# Altium PCB PA_Receiver.PcbDoc (part 2 of 2)
Units mm, origin at the board's own origin, x right, y up, seen from the top; angles counter-clockwise.
Board outline 99.95 x 68.33 mm, 4 copper layers (Top Layer, Layer 1, Layer 2, Bottom Layer), stack 0.603 mm thick; 128 components, 106 nets, 468 pads, 289 vias.
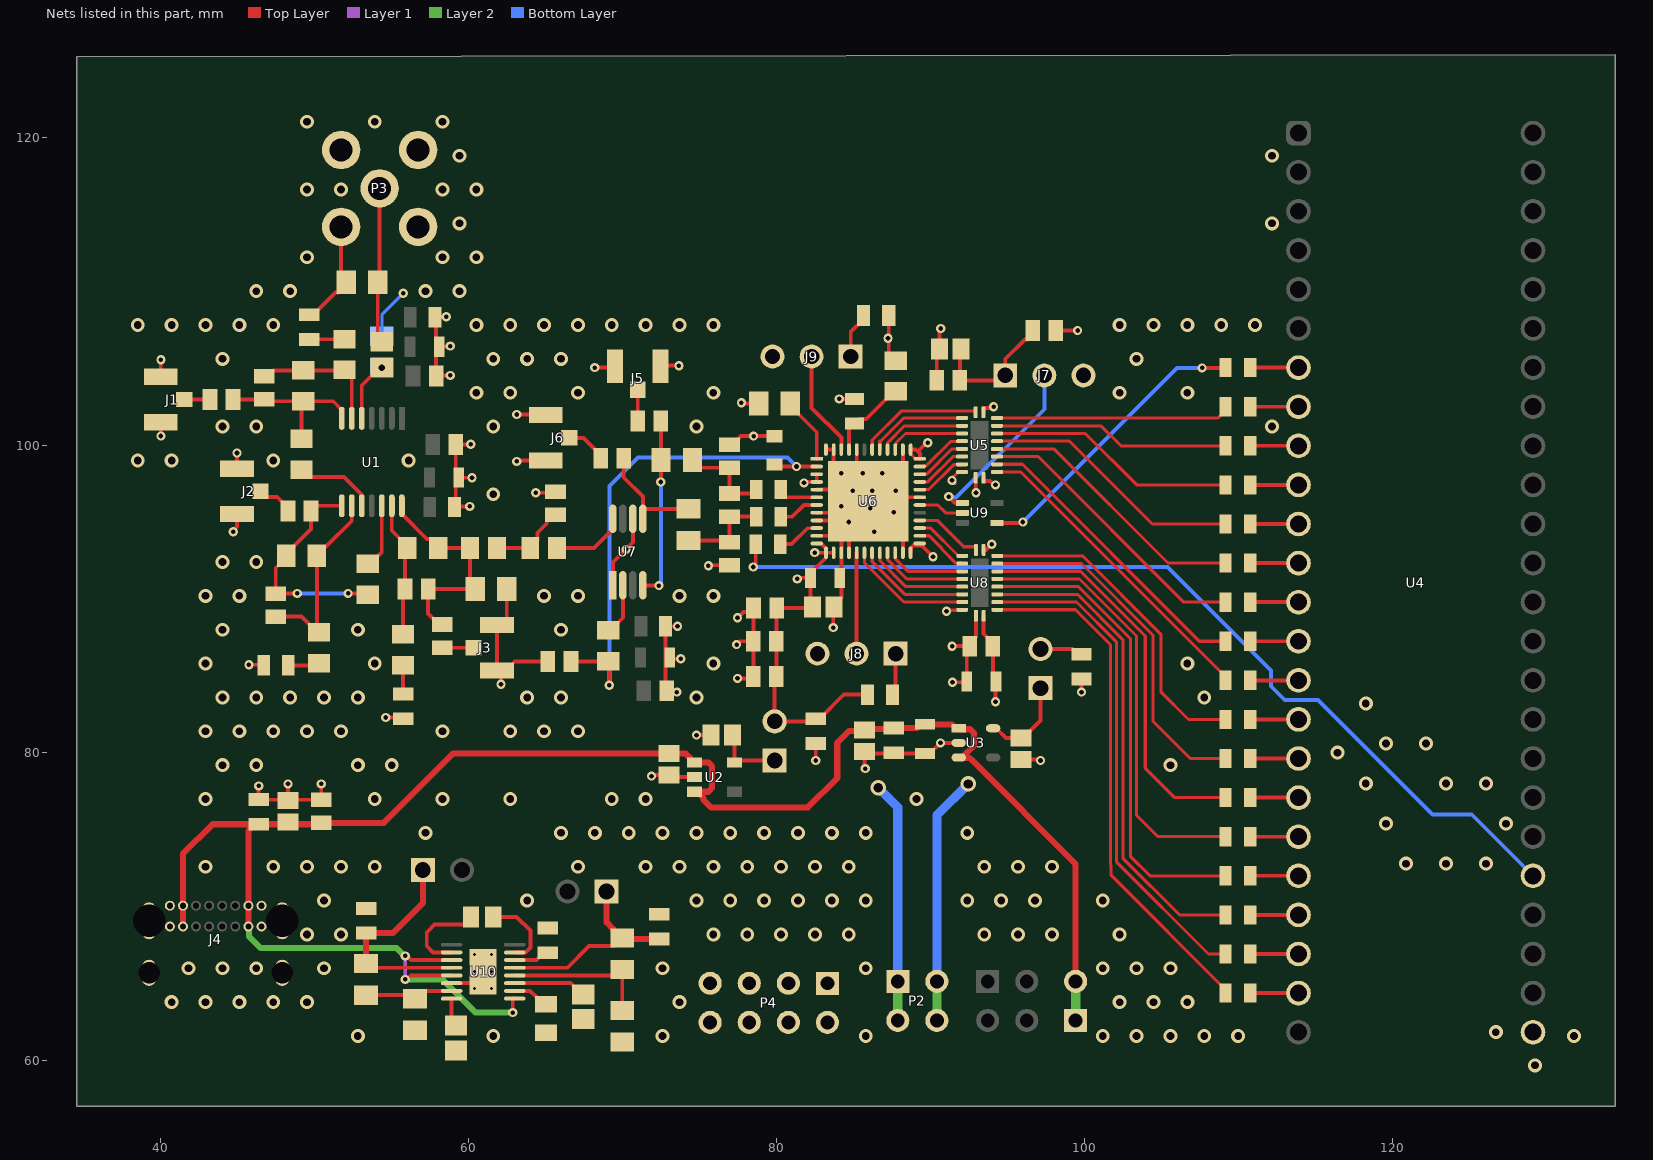
[diagram p4: the nets of this part, all layers, seen from the top]

## Via types
v1: diameter 0.9, hole 0.5, Top Layer to Bottom Layer, tented top, 195 vias
v2: diameter 0.6, hole 0.3, Top Layer to Bottom Layer, tented top, 84 vias
v3: diameter 0.5, hole 0.2, Top Layer to Bottom Layer, tented top, 6 vias
v4: diameter 1, hole 0.6, Top Layer to Bottom Layer, tented top, 2 vias
v5: diameter 0.6, hole 0.3, Top Layer to Bottom Layer, tented both sides, 1 vias
v6: diameter 0.8, hole 0.4, Top Layer to Bottom Layer, tented both sides, 1 vias

## Nets (pads, with @x,y where several pads share a name; then routed paths per layer and width w, separated by ;. In a path a pad name is that pad's centre, name@x,y a point inside that pad or via, vN(x,y) a via of type N, cw(c..) or ccw(c..) an arc to the next point about the centre after c; other vN are vias at no path point) (continued)
ADC_AVDD: C19.2 C20.1 C21.1 C22.1 C23.1 C24.1 P2.1 P2.3 R36.2 R37.2 R38.2 R39.2 U6.3 U6.4 U6.12 U6.13 U6.14 W3.2 | length 44.9
  Top Layer w0.25: v2(77.724,102.743) 77.765,102.702 R36.2@78.844,102.702 ; v2(81.355,91.301) 81.43,91.375 C21.1@82.205,91.375 ; v2(81.788,97.536) 81.854,97.602 U6.4@82.614,97.602 U6.3@82.614,98.102 ; v2(82.489,93.011) 82.5,93.001 U6.13@83.215,93.001 ; U6.12@82.614,93.602 82.898,93.602 83.215,93.284 U6.13@83.215,93.001 ; U6.14@83.715,93.001 U6.13@83.215,93.001 ; R37.2@85.902,83.779 84.372,83.779 82.8,82.207 C20.1@82.55,82.207 82.385,82.042 W3.2@79.883,82.042 79.883,84.848 C22.1@79.998,84.963 79.998,89.396 C24.1@80.01,89.408 82.267,89.408 C19.2@82.328,89.47 82.205,89.593 C21.1@82.205,91.375 ; R38.2@87.298,108.417 87.298,105.925 R39.2@87.743,105.48 ; C21.1@82.205,91.375 82.205,91.675 83.207,92.677 83.207,92.992 U6.13@83.215,93.001
  Layer 2 w0.6: P2.3@87.884,62.611 P2.1@87.884,65.151
  Bottom Layer w0.6: v4(86.614,77.724) 87.884,76.454 P2.1@87.884,65.151
  other v2: 87.249,106.934
ADC_CLKIN: R34.1 U4.29 | length 61.1
  Top Layer w0.25: v2(78.486,92.075) 78.65,92.239 R34.1@78.65,93.558
  Bottom Layer w0.25: v2(78.486,92.075) 105.41,92.075 112.138,85.347 ; 112.141,85.344 112.141,84.328 113.03,83.439 115.189,83.439 122.639,75.989 125.179,75.989 U4.29@129.159,72.009
ADC_CLKOUT: U6.30 U9.2 | length 3
  Top Layer w0.2: U6.30@89.317,96.102 90.481,96.102 90.993,95.59 U9.2@92.079,95.59
ADC_CLKOUT_F: R12.1 U9.4 | length 19
  Top Layer w0.25: U9.4@94.329,94.94 95.956,94.94 v2(96.012,94.996) ; v2(107.657,105.012) 109.165,105.012 R12.1@109.182,105.029
  Bottom Layer w0.25: v2(96.012,94.996) 106.028,105.012 v2(107.657,105.012)
ADC_DITH: J8.2 U6.17 | length 6.6
  Top Layer w0.25: J8.2@85.203,86.446 85.209,86.452 85.209,92.995 U6.17@85.215,93.001
ADC_MODE: R39.1 R40.2 U6.45 | length 5.4
  Top Layer w0.25: U6.45@84.715,99.703 84.715,101.094 85.015,101.394 R40.2@85.076,101.394 85.376,101.694 85.832,101.694 87.618,103.48 R39.1@87.743,103.48
ADC_OVDD: C33.2 C34.1 C35.1 C36.1 C37.1 C48.1 J7.1 P2.2 P2.4 U5.20 U6.24 U6.25 U6.36 U6.37 U8.20 W4.2 | length 41.2
  Top Layer w0.2: U6.37@88.715,99.703 88.715,99.419 89.033,99.102 U6.36@89.317,99.102
  Top Layer w0.25: U6.24@88.715,93.001 88.715,93.284 88.884,93.452 ; U6.37@88.715,99.703 89.051,99.703 89.178,99.576 ; U6.25@89.317,93.602 89.033,93.602 88.884,93.452 ; U6.36@89.317,99.102 89.317,99.438 89.178,99.576 ; v2(89.827,100.149) 89.751,100.149 89.178,99.576 ; v2(90.175,92.74) 89.463,93.452 88.884,93.452 ; v2(91.411,86.926) 91.414,86.93 C36.1@92.565,86.93 ; v2(91.44,84.582) 92.304,84.582 C35.1@92.365,84.644 92.365,86.73 C36.1@92.565,86.93 ; C33.2@91.983,106.234 91.918,106.169 C37.1@91.918,104.202 94.55,104.202 J7.1@94.869,104.521 94.869,105.596 96.14,106.867 96.284,106.867 96.659,107.242 C48.1@96.659,107.442 ; U5.20@92.946,97.864 92.951,97.859 92.951,96.914 v2(92.964,96.901) ; U8.20@92.962,88.911 92.962,87.527 92.565,87.13 C36.1@92.565,86.93 ; W4.2@97.155,86.741 99.229,86.741 99.572,86.398 C34.1@99.822,86.398
  Layer 1 w0.25: v2(89.827,100.149) 89.862,100.149 v2@89.916,100.203
  Layer 2 w0.6: P2.4@90.424,62.611 P2.2@90.424,65.151
  Bottom Layer w0.6: P2.2@90.424,65.151 90.424,75.946 v4(92.456,77.978)
ADC_RAND: J9.2 U6.46 | length 6.8
  Top Layer w0.25: J9.2@82.282,105.75 82.282,102.416 84.215,100.483 U6.46@84.215,99.703
ADC_VCM: C43.1 C49.1 R22.1 U6.2 | length 32.9
  Top Layer w0.25: C43.1@66.649,85.938 69.058,85.938 R22.1@69.074,85.954 69.142,85.886 v2(69.142,84.395) ; C49.1@79.869,98.729 79.996,98.602 v2(81.305,98.602) U6.2@82.614,98.602
  Bottom Layer w0.25: v2(69.142,84.395) 69.142,97.336 70.993,99.187 80.72,99.187 v2(81.305,98.602)
GND: C1.2 C2.2 C3.2 C4.2 C5.2 C6.2 C7.2 C8.2 C12.1 C13.2 C14.2 C15.2 C17.1 C18.1 C19.1 C20.2 C21.2 C22.2 C23.2 C24.2 C25.1 C26.1 C30.2 C31.2 C32.2 C33.1 C34.2 C35.2 C36.2 C37.2 C38.2 C39.2 C40.2 C42.1 C43.2 C45.2 C46.2 C48.2 C49.2 C50.2 C51.1 C52.1 C54.2 J1.2 J1.3 J2.2 J2.3 J3.2 J3.3 J4.1 J4.2 J4.3 J4.4 J4.A1 J4.A12 J4.B1 J4.B12 J5.2 J5.3 J6.2 J6.3 J7.3 J8.3 J9.3 P3.2 P4.1 P4.2 P4.3 P4.4 P4.5 P4.6 P4.7 P4.8 R4.1 R5.1 R40.1 R42.1 R43.2 R44.1 R46.1 U2.2 U3.2 U4.25 U5.1 U5.10 U5.19 U6.5 U6.8 U6.9 U6.11 U6.15 U6.16 U6.23 U6.31 U6.38 U6.44 U6.47 U6.48 U6.49 U7.1 U7.6 U8.1 U8.10 U8.19 U10.14 U10.17 | length 148.5
  Top Layer w0.2: v2@91.479,97.917 91.811,98.249 U5.19@92.061,98.249
  Top Layer w0.25: J1.3@39.99,101.481 39.99,100.599 v2(40.005,100.584) ; J1.2@39.99,104.431 39.99,105.522 v2(40.005,105.537) ; v2(44.704,94.361) 44.704,94.446 44.944,94.687 J2.3@44.944,95.512 ; J2.2@44.944,98.462 v2@44.944,99.477 ; v2(45.72,85.725) 46.643,85.725 C31.2@46.684,85.684 ; v2(46.355,77.851) C4.2@46.355,76.962 46.367,76.95 C15.2@50.419,76.95 v2(50.419,77.978) ; J4.2@47.886,69.085 J4.2@47.886,69.835 ; C12.1@48.26,76.9 v2(48.26,77.978) ; C30.2@49.643,108.455 49.893,108.455 51.339,109.901 51.522,109.901 52.047,110.426 R4.1@52.047,110.576 51.715,110.908 P3.2@51.715,114.172 ; v2(54.61,82.296) 55.66,82.296 C32.2@55.739,82.217 ; C2.2@58.086,106.385 58.76,106.385 v2(58.801,106.426) ; v2(58.547,108.331) 57.851,108.331 C1.2@57.809,108.29 57.886,108.213 C3.2@57.886,104.48 57.928,104.521 v2(58.801,104.521) ; U10.14@58.892,65.032 60.192,65.032 U10.17@60.942,65.782 ; C7.2@59.356,97.876 60.216,97.876 v2(60.22,97.88) ; v2(60.071,96.012) 59.121,96.012 C6.2@59.079,95.971 59.156,96.048 C8.2@59.156,100.035 60.125,100.035 v2(60.141,100.051) ; J3.3@61.835,88.302 J3.2@61.835,85.352 ; J3.3@62.054,88.302 62.479,88.727 R5.1@62.479,90.637 ; v2(62.103,84.455) 62.103,85.084 J3.2@61.835,85.352 ; v2(63.119,98.933) 63.176,98.99 J6.3@65.01,98.99 ; v2(63.119,101.981) 64.969,101.981 J6.2@65.01,101.94 ; v2(64.353,96.899) 65.569,96.899 C45.2@65.645,96.975 ; C43.2@65.149,85.938 62.996,85.938 62.41,85.352 J3.2@61.835,85.352 ; v2(68.199,105.029) 69.419,105.029 J5.3@69.504,105.115 ; U7.1@69.369,90.89 69.369,92.382 70.669,93.682 U7.6@70.669,95.21 ; v2(71.882,78.486) 71.944,78.548 C17.1@73.025,78.548 73.148,78.425 U2.2@74.676,78.425 ; J5.2@72.454,105.115 72.496,105.156 v2(73.66,105.156) ; C39.2@73.072,86.192 73.158,86.106 v2(73.787,86.106) ; v2(73.533,83.947) 72.958,83.947 C40.2@72.872,84.033 72.795,84.11 C38.2@72.795,88.224 v2(73.566,88.224) ; v2(74.803,81.153) C18.1@75.754,81.153 ; v2(75.577,92.154) 75.607,92.185 C46.2@76.948,92.185 ; C42.1@76.948,100.023 77.148,100.023 77.704,100.579 v2@78.486,100.579 ; v2(77.411,87.031) 77.629,87.249 C23.2@78.486,87.249 ; v2(77.47,84.836) 78.371,84.836 C22.2@78.498,84.963 78.51,84.975 C24.2@78.51,89.408 78.257,89.155 77.852,89.155 v2(77.47,88.773) ; v2(78.516,100.579) v2@78.486,100.579 ; C49.2@79.869,100.579 v2@78.486,100.579 ; v2(82.55,79.502) C20.2@82.55,80.607 ; U6.11@82.614,94.102 83.715,94.102 84.215,94.602 U6.15@84.215,93.001 84.215,90.082 83.728,89.595 C19.1@83.728,89.47 83.693,89.434 v2(83.693,88.138) ; U6.9@82.614,95.102 84.715,95.102 U6.16@84.715,93.001 ; U6.8@82.614,95.602 U6.49@85.215,95.602 ; U6.5@82.614,97.102 U6.49@85.215,97.102 ; U6.48@83.215,99.703 U6.47@83.715,99.703 83.715,98.602 U6.49@84.174,98.144 ; v2(84.074,102.997) 85.073,102.997 R40.1@85.076,102.994 ; U6.44@85.215,99.703 U6.49@85.215,97.102 ; v2(85.767,78.976) 85.725,79.018 C25.1@85.725,80.072 85.848,79.949 C14.2@89.662,79.949 89.962,79.949 v2(90.658,80.645) U3.2@91.849,80.645 ; U6.49@85.965,96.352 U6.49@85.215,97.102 ; U6.49@86.269,96.048 88.215,94.102 U6.23@88.215,93.001 ; U6.38@88.215,99.703 88.215,98.602 86.215,96.602 U6.31@89.317,96.602 ; C37.2@90.418,104.202 90.418,106.069 C33.1@90.583,106.234 90.583,107.474 v2(90.678,107.569) ; v2(91.051,89.196) 91.121,89.266 92.047,89.266 U8.19@92.077,89.296 ; v2(91.403,97.7) 91.479,97.777 v2@91.479,97.917 ; U5.1@93.446,97.864 93.446,97.683 93.476,97.653 93.882,97.653 94.126,97.409 v2(94.234,97.409) ; U5.10@93.446,102.134 93.446,102.384 93.476,102.414 94.032,102.414 v2(94.107,102.489) ; U8.1@93.462,88.911 93.462,87.733 94.065,87.13 C36.2@94.065,86.93 94.065,84.844 C35.2@94.265,84.644 94.234,84.612 v2(94.234,83.312) ; U8.10@93.462,93.181 93.621,93.181 v2(93.99,93.549) ; C26.1@95.885,79.564 97.093,79.564 v2(97.155,79.502) ; C48.2@98.159,107.442 v2(99.568,107.442) ; v2(99.822,83.947) C34.2@99.822,84.798
  Layer 1 w0.25: v2(44.944,99.478) 44.958,99.464 v2@44.958,99.441 ; v2(64.353,96.899) v2@64.356,96.901 ; v2(77.47,84.836) v2@77.597,84.963 ; v2@78.516,100.541 v2(78.516,100.579) ; v2(91.051,89.196) v2@91.051,89.223 ; v2(91.403,97.7) v2@91.567,97.536
  Bottom Layer w0.2: R46.1@54.356,107.07 54.356,108.458 v5(55.753,109.855)
  Bottom Layer w0.25: v2(40.005,105.537) v2@40.005,105.664
  other v1: 129.286,59.69 52.8,61.6 61.6,61.6 72.6,61.6 85.8,61.6 101.2,61.6 103.4,61.6 105.6,61.6 107.8,61.6 110,61.6 131.826,61.595 126.746,61.849 40.7,63.8 42.9,63.8 45.1,63.8 47.3,63.8 49.5,63.8 73.7,63.8 102.3,63.8 104.5,63.8 106.7,63.8 41.8,66 44,66 46.2,66 50.6,66 72.6,66 85.8,66 101.2,66 103.4,66 105.6,66 49.5,68.2 51.7,68.2 75.9,68.2 78.1,68.2 80.3,68.2 82.5,68.2 84.7,68.2 93.5,68.2 95.7,68.2 97.9,68.2 102.3,68.2 50.6,70.4 63.8,70.4 74.8,70.4 77,70.4 79.2,70.4 81.4,70.4 83.6,70.4 85.8,70.4 92.4,70.4 94.6,70.4 96.8,70.4 101.2,70.4 42.9,72.6 47.3,72.6 49.5,72.6 51.7,72.6 53.9,72.6 67.1,72.6 71.5,72.6 73.7,72.6 75.9,72.6 78.1,72.6 80.3,72.6 82.5,72.6 84.7,72.6 93.5,72.6 95.7,72.6 97.9,72.6 120.9,72.8 123.5,72.8 126.1,72.8 57.2,74.8 66,74.8 68.2,74.8 70.4,74.8 72.6,74.8 74.8,74.8 77,74.8 79.2,74.8 81.4,74.8 83.6,74.8 85.8,74.8 92.4,74.8 119.6,75.4 127.4,75.4 42.9,77 53.9,77 58.3,77 62.7,77 69.3,77 71.5,77 89.1,77 118.3,78 123.5,78 126.1,78 44,79.2 46.2,79.2 52.8,79.2 55,79.2 105.6,79.2 116.459,80.01 119.6,80.6 122.2,80.6 42.9,81.4 45.1,81.4 47.3,81.4 49.5,81.4 51.7,81.4 58.3,81.4 62.7,81.4 64.9,81.4 67.1,81.4 118.3,83.2 44,83.6 46.2,83.6 48.4,83.6 50.6,83.6 52.8,83.6 63.8,83.6 66,83.6 74.8,83.6 107.8,83.6 42.9,85.8 53.9,85.8 75.9,85.8 106.7,85.8 44,88 52.8,88 66,88 42.9,90.2 45.1,90.2 64.9,90.2 67.1,90.2 73.7,90.2 75.9,90.2 44,92.4 46.2,92.4 61.6,96.8 38.5,99 40.7,99 47.3,99 56.1,99 44,101.2 46.2,101.2 61.6,101.2 74.8,101.2 112.2,101.2 60.5,103.4 62.7,103.4 67.1,103.4 75.9,103.4 102.3,103.4 106.7,103.4 44,105.6 61.6,105.6 63.8,105.6 66,105.6 103.4,105.6 38.5,107.8 40.7,107.8 42.9,107.8 45.1,107.8 47.3,107.8 60.5,107.8 62.7,107.8 64.9,107.8 67.1,107.8 69.3,107.8 71.5,107.8 73.7,107.8 75.9,107.8 102.3,107.8 104.5,107.8 106.7,107.8 108.9,107.8 111.1,107.8 46.2,110 48.4,110 57.2,110 59.4,110 49.5,112.2 58.3,112.2 60.5,112.2 59.4,114.4 112.2,114.4 49.5,116.6 51.7,116.6 58.3,116.6 60.5,116.6 59.4,118.8 112.2,118.8 49.5,121 53.9,121 58.3,121
  other v2: 70.231,93.218 86.36,94.361 84.709,94.996 87.63,95.631 86.106,95.885 84.201,96.012 84.963,97.028 86.233,97.028 87.757,97.028 84.201,98.171 85.598,98.171 86.868,98.171
  other v3: 60.392,64.682 61.492,64.682 60.392,65.782 61.492,65.782 60.392,66.882 61.492,66.882
LTC3260_ADJ+: R41.1 R42.2 U10.15 | length 5.9
  Top Layer w0.25: R41.1@53.34,64.253 56.279,64.253 R42.2@56.515,64.017 57.03,64.532 U10.15@58.892,64.532
LTC3260_ADJ-: R43.1 R45.2 U10.4 | length 9.8
  Top Layer w0.25: U10.4@62.992,65.532 69.596,65.532 R45.2@69.977,65.913 R43.1@69.977,63.255
LTC3260_BYP+: C51.2 U10.16 | length 1.9
  Top Layer w0.25: U10.16@58.892,64.032 58.892,62.558 C51.2@59.182,62.268
LTC3260_BYP-: C52.2 U10.3 | length 4.7
  Top Layer w0.25: U10.3@62.992,65.032 66.63,65.032 67.362,64.3 C52.2@67.437,64.3
LTC3260_LDO+: C5.1 R41.2 U10.12 W1.1 | length 14.3
  Top Layer w0.25: R41.2@53.34,66.303 53.611,66.032 U10.12@58.892,66.032
  Top Layer w0.4: R41.2@53.34,66.303 C5.1@53.34,68.288 55.08,68.288 57.023,70.231 W1.1@57.023,72.39
LTC3260_LDO-: C54.1 R45.1 U10.5 W2.1 | length 13.8
  Top Layer w0.25: U10.5@62.992,66.032 66.413,66.032 67.819,67.438 69.452,67.438 R45.1@69.977,67.963
  Top Layer w0.4: W2.1@68.961,70.993 68.961,68.979 69.402,68.538 69.402,68.388 69.827,67.963 R45.1@69.977,67.963 70.033,67.907 C54.1@72.39,67.907
NetC9_1: C9.1 J1.1 | length 1.7
  Top Layer w0.25: J1.1@41.515,102.956 C9.1@43.19,102.956
NetC9_2: C9.2 C27.2 R1.1 R6.2 U1.7 | length 10.4
  Top Layer w0.25: C9.2@44.69,102.956 44.702,102.968 C27.2@46.722,102.968 46.845,102.845 R6.2@49.262,102.845 ; R1.1@49.135,100.4 49.135,102.718 R6.2@49.262,102.845 ; U1.7@51.757,101.733 51.757,102.287 51.199,102.845 R6.2@49.262,102.845
NetC10_1: C10.1 J2.1 | length 2.4
  Top Layer w0.25: J2.1@46.469,96.987 46.842,96.614 47.561,96.614 48.258,95.917 C10.1@48.258,95.717
NetC10_2: C10.2 C28.2 R2.1 R7.2 U1.8 | length 14.4
  Top Layer w0.25: R7.2@48.135,92.796 48.135,92.671 47.468,92.004 C28.2@47.468,90.347 47.48,90.359 v2(48.865,90.359) ; R7.2@48.135,92.921 49.758,94.544 C10.2@49.758,95.717 50.092,96.051 U1.8@51.757,96.051 ; v2(52.167,90.359) 53.366,90.359 R2.1@53.453,90.272
  Bottom Layer w0.25: v2(48.865,90.359) v2(52.167,90.359)
NetC11_1: C11.1 J3.1 | length 2
  Top Layer w0.25: C11.1@58.279,86.839 58.291,86.827 J3.1@60.31,86.827
NetC11_2: C11.2 C29.2 R3.1 R5.2 R8.2 U1.14 | length 14.6
  Top Layer w0.25: U1.14@55.657,96.051 55.657,95.52 57.275,93.902 57.536,93.902 58.009,93.429 R8.2@58.009,93.304 R3.1@60.085,93.304 60.085,90.981 R5.2@60.429,90.637 C29.2@57.366,90.637 57.366,89.052 58.079,88.339 C11.2@58.279,88.339
NetC16_1: C16.1 P3.1 R4.2 | length 10.1
  Top Layer w0.25: P3.1@54.215,116.672 54.215,110.694 R4.2@54.097,110.576 54.097,106.948 C16.1@54.342,106.703
NetC16_2: C16.2 R46.2 U1.5 | length 3.9
  Top Layer w0.25: U1.5@53.057,101.733 53.057,103.867 54.241,105.051 C16.2@54.342,105.051
  other v6: 54.356,105.02
NetC18_2: C18.2 U2.5 W3.1 | length 4.5
  Top Layer w0.25: C18.2@77.154,81.153 77.276,81.031 U2.5@77.276,79.375 77.403,79.502 W3.1@79.883,79.502
NetC26_2: C26.2 U3.5 W4.1 | length 5.9
  Top Layer w0.25: U3.5@94.08,81.595 94.279,81.595 94.91,80.964 C26.2@95.885,80.964 96.01,80.964 97.155,82.109 W4.1@97.155,84.201
NetC27_1: C27.1 R6.1 R9.1 U1.6 | length 8.7
  Top Layer w0.25: C27.1@46.722,104.468 46.922,104.468 47.299,104.845 R6.1@49.262,104.845 51.897,104.845 R9.1@51.929,104.877 51.934,104.877 52.407,104.404 U1.6@52.407,101.733
NetC28_1: C28.1 R7.1 R10.1 U1.9 | length 12.4
  Top Layer w0.25: C28.1@47.468,88.847 49.133,88.847 50.153,87.827 R10.1@50.278,87.827 50.135,87.97 R7.1@50.135,92.796 ; R7.1@50.135,92.921 50.608,93.394 50.733,93.394 52.407,95.068 U1.9@52.407,96.051
NetC29_1: C29.1 R8.1 R11.1 U1.13 | length 8.9
  Top Layer w0.25: U1.13@55.007,96.051 55.007,94.431 56.009,93.429 55.866,93.286 C29.1@55.866,90.637 55.739,90.51 R11.1@55.739,87.7
NetC30_1: C30.1 R9.2 | length 2.3
  Top Layer w0.25: C30.1@49.643,106.855 49.665,106.877 R9.2@51.929,106.877
NetC31_1: C31.1 R10.2 | length 2.1
  Top Layer w0.25: C31.1@48.284,85.684 50.135,85.684 R10.2@50.278,85.827
NetC32_1: C32.1 R11.2 | length 1.9
  Top Layer w0.25: C32.1@55.739,83.817 R11.2@55.739,85.7
NetC41_1: C41.1 J5.1 | length 2
  Top Layer w0.25: J5.1@70.979,103.59 70.991,103.578 C41.1@70.991,101.559
NetC41_2: C41.2 R28.2 U7.4 | length 11.8
  Top Layer w0.25: U7.4@71.319,90.89 71.342,90.867 v2(72.36,90.867) ; v2(72.487,97.598) 72.487,99.012 R28.2@72.494,99.019 72.491,99.022 C41.2@72.491,101.559
  Bottom Layer w0.25: v2(72.36,90.867) 72.36,90.96 72.487,91.087 v2(72.487,97.598)
NetC42_2: C42.2 C44.1 R26.1 R28.1 | length 6.1
  Top Layer w0.25: R28.1@74.544,99.019 75.04,98.523 C42.2@76.948,98.523 C44.1@76.948,96.848 78.422,96.848 R26.1@78.688,97.114
NetC44_2: C44.2 C46.1 R30.1 R33.1 | length 6.1
  Top Layer w0.25: R33.1@74.281,93.803 76.83,93.803 C46.1@76.948,93.685 C44.2@76.948,95.348 78.676,95.348 R30.1@78.688,95.336
NetC47_1: C47.1 R33.2 U7.5 | length 8
  Top Layer w0.25: C47.1@70.078,99.146 70.078,97.887 71.319,96.646 U7.5@71.319,95.21 71.319,95.741 71.431,95.853 R33.2@74.281,95.853
NetC47_2: C47.2 J6.1 | length 2.7
  Top Layer w0.25: J6.1@66.535,100.465 67.459,100.465 68.578,99.346 C47.2@68.578,99.146
NetC50_1: C50.1 U10.6 | length 2.4
  Top Layer w0.25: U10.6@62.992,66.532 64.415,66.532 64.901,67.018 C50.1@65.151,67.018
NetC53_1: C53.1 U10.10 | length 6
  Top Layer w0.25: U10.10@58.892,67.032 57.682,67.032 57.277,67.437 57.277,68.326 57.785,68.834 59.716,68.834 60.143,69.261 C53.1@60.143,69.342
NetC53_2: C53.2 U10.7 | length 5
  Top Layer w0.25: C53.2@61.595,69.342 63.119,69.342 64.017,68.444 64.017,67.346 63.703,67.032 U10.7@62.992,67.032
NetJ7_2: J7.2 U9.1 | length 11.9
  Top Layer w0.25: v2(91.202,96.651) 91.613,96.24 U9.1@92.079,96.24
  Bottom Layer w0.25: v2(91.202,96.651) 91.269,96.584 91.669,96.584 97.409,102.323 J7.2@97.409,104.521
NetJ8_1: J8.1 R37.1 | length 2.7
  Top Layer w0.25: R37.1@87.552,83.779 87.743,83.97 J8.1@87.743,86.446
NetJ9_1: J9.1 R38.1 | length 3
  Top Layer w0.25: J9.1@84.822,105.75 84.822,107.341 85.648,108.167 R38.1@85.648,108.417
NetR1_2: R1.2 U1.10 | length 5.3
  Top Layer w0.25: R1.2@49.135,98.4 49.608,97.927 51.893,97.927 53.033,96.787 53.033,96.075 U1.10@53.057,96.051
NetR2_2: R2.2 U1.12 | length 4.2
  Top Layer w0.25: R2.2@53.453,92.272 53.578,92.272 54.357,93.051 U1.12@54.357,96.051
NetR12_2: R12.2 U4.7 | length 3.1
  Top Layer w0.25: R12.2@110.782,105.029 U4.7@113.919,105.029
NetR13_1: R13.1 U5.9 | length 15.3
  Top Layer w0.2: U5.9@94.331,101.749 108.667,101.749 109.182,102.264 R13.1@109.182,102.489
NetR13_2: R13.2 U4.8 | length 3.1
  Top Layer w0.25: R13.2@110.782,102.489 U4.8@113.919,102.489
NetR14_1: R14.1 U5.8 | length 15.4
  Top Layer w0.2: U5.8@94.331,101.249 101.082,101.249 102.382,99.949 R14.1@109.182,99.949
NetR14_2: R14.2 U4.9 | length 3.1
  Top Layer w0.25: R14.2@110.782,99.949 U4.9@113.919,99.949
NetR15_1: R15.1 U5.7 | length 16.2
  Top Layer w0.2: U5.7@94.331,100.749 100.062,100.749 103.402,97.409 R15.1@109.182,97.409
NetR15_2: R15.2 U4.10 | length 3.1
  Top Layer w0.25: R15.2@110.782,97.409 U4.10@113.919,97.409
NetR16_1: R16.1 U5.6 | length 17.1
  Top Layer w0.2: U5.6@94.331,100.249 99.042,100.249 104.422,94.869 R16.1@109.182,94.869
NetR16_2: R16.2 U4.11 | length 3.1
  Top Layer w0.25: R16.2@110.782,94.869 U4.11@113.919,94.869
NetR17_1: R17.1 U5.5 | length 17.9
  Top Layer w0.2: U5.5@94.331,99.749 98.022,99.749 105.442,92.329 R17.1@109.182,92.329
NetR17_2: R17.2 U4.12 | length 3.1
  Top Layer w0.25: R17.2@110.782,92.329 U4.12@113.919,92.329
NetR18_1: R18.1 U5.4 | length 18.8
  Top Layer w0.2: U5.4@94.331,99.249 97.002,99.249 106.462,89.789 R18.1@109.182,89.789
NetR18_2: R18.2 U4.13 | length 3.1
  Top Layer w0.25: R18.2@110.782,89.789 U4.13@113.919,89.789
NetR19_1: R19.1 U5.3 | length 19.6
  Top Layer w0.2: U5.3@94.331,98.749 95.982,98.749 107.482,87.249 R19.1@109.182,87.249
NetR19_2: R19.2 U4.14 | length 3.1
  Top Layer w0.25: R19.2@110.782,87.249 U4.14@113.919,87.249
NetR20_1: R20.1 U5.2 | length 20.6
  Top Layer w0.2: U5.2@94.331,98.249 95.867,98.249 109.182,84.934 R20.1@109.182,84.709
NetR20_2: R20.2 U4.15 | length 3.1
  Top Layer w0.25: R20.2@110.782,84.709 U4.15@113.919,84.709
NetR21_1: R21.1 U8.9 | length 21.4
  Top Layer w0.2: U8.9@94.347,92.796 99.886,92.796 104.979,87.702 104.979,83.957 106.768,82.169 R21.1@109.182,82.169
NetR21_2: R21.2 U4.16 | length 3.1
  Top Layer w0.25: R21.2@110.782,82.169 U4.16@113.919,82.169
NetR22_2: R22.2 U7.2 | length 3.4
  Top Layer w0.25: R22.2@69.074,87.954 69.199,87.954 70.019,88.774 U7.2@70.019,90.89
NetR23_1: R23.1 U8.8 | length 23.4
  Top Layer w0.2: U8.8@94.347,92.296 99.82,92.296 104.471,87.645 104.471,82.052 106.895,79.629 R23.1@109.182,79.629
NetR23_2: R23.2 U4.17 | length 3.1
  Top Layer w0.25: R23.2@110.782,79.629 U4.17@113.919,79.629
NetR24_1: R24.1 U8.7 | length 26
  Top Layer w0.2: U8.7@94.347,91.796 99.755,91.796 103.963,87.587 103.963,79.004 105.879,77.089 R24.1@109.182,77.089
NetR24_2: R24.2 U4.18 | length 3.1
  Top Layer w0.25: R24.2@110.782,77.089 U4.18@113.919,77.089
NetR25_2: R25.2 U7.8 | length 4.8
  Top Layer w0.25: R25.2@65.744,93.304 68.136,93.304 69.369,94.537 U7.8@69.369,95.21
NetR26_2: R26.2 U6.6 | length 2.7
  Top Layer w0.25: R26.2@80.288,97.114 80.288,96.902 80.588,96.602 U6.6@82.614,96.602
NetR27_1: R27.1 U8.6 | length 28.6
  Top Layer w0.2: U8.6@94.347,91.296 99.689,91.296 103.397,87.588 103.397,75.946 104.794,74.549 R27.1@109.182,74.549
NetR27_2: R27.2 U4.19 | length 3.1
  Top Layer w0.25: R27.2@110.782,74.549 U4.19@113.919,74.549
NetR29_1: R29.1 U8.5 | length 30.9
  Top Layer w0.2: U8.5@94.347,90.796 99.623,90.796 102.997,87.422 102.997,73.279 104.267,72.009 R29.1@109.182,72.009
NetR29_2: R29.2 U4.20 | length 3.1
  Top Layer w0.25: R29.2@110.782,72.009 U4.20@113.919,72.009
NetR30_2: R30.2 U6.7 | length 2.6
  Top Layer w0.25: R30.2@80.288,95.336 81.02,95.336 81.786,96.102 U6.7@82.614,96.102
NetR31_1: R31.1 U8.4 | length 31.8
  Top Layer w0.2: U8.4@94.347,90.296 99.558,90.296 102.508,87.345 102.508,73.152 106.191,69.469 R31.1@109.182,69.469
NetR31_2: R31.2 U4.21 | length 3.1
  Top Layer w0.25: R31.2@110.782,69.469 U4.21@113.919,69.469
NetR32_1: R32.1 U8.3 | length 32.7
  Top Layer w0.2: U8.3@94.347,89.796 99.492,89.796 102.108,87.18 102.108,72.898 108.077,66.929 R32.1@109.182,66.929
NetR32_2: R32.2 U4.22 | length 3.1
  Top Layer w0.25: R32.2@110.782,66.929 U4.22@113.919,66.929
NetR34_2: R34.2 U6.10 | length 2.8
  Top Layer w0.25: R34.2@80.25,93.558 80.985,93.558 82.021,94.594 82.606,94.594 U6.10@82.614,94.602
NetR35_1: R35.1 U8.2 | length 34
  Top Layer w0.2: U8.2@94.347,89.296 99.426,89.296 101.708,87.014 101.708,72.732 101.727,72.713 101.727,72.069 109.182,64.614 R35.1@109.182,64.389
NetR35_2: R35.2 U4.23 | length 3.1
  Top Layer w0.25: R35.2@110.782,64.389 U4.23@113.919,64.389
NetR36_1: R36.1 U6.1 | length 4.3
  Top Layer w0.25: R36.1@80.894,102.702 80.894,102.552 82.614,100.832 U6.1@82.614,99.102
NetR44_2: R44.2 U10.2 | length 2.4
  Top Layer w0.25: U10.2@62.992,64.532 63.992,64.532 64.399,64.125 64.399,64.088 64.824,63.663 R44.2@65.024,63.663
NetU5_11: U5.11 U6.42 | length 8.1
  Top Layer w0.2: U6.42@86.215,99.703 86.223,99.711 86.223,100.323 88.104,102.204 U5.11@92.891,102.204
NetU5_12: U5.12 U6.41 | length 7
  Top Layer w0.2: U6.41@86.715,99.703 86.723,99.711 86.723,100.222 88.25,101.749 U5.12@92.061,101.749
  Top Layer w0.25: U6.41@86.715,99.703 86.719,99.707 86.719,100.217
NetU5_13: U5.13 U6.40 | length 5.7
  Top Layer w0.2: U6.40@87.215,99.703 87.223,99.711 87.223,100.156 88.316,101.249 U5.13@92.061,101.249
NetU5_14: U5.14 U6.39 | length 5
  Top Layer w0.2: U6.39@87.715,99.703 87.715,99.998 87.794,100.077 87.794,100.161 88.382,100.749 U5.14@92.061,100.749
NetU5_15: U5.15 U6.35 | length 3.4
  Top Layer w0.2: U6.35@89.317,98.602 89.612,98.602 89.69,98.681 89.775,98.681 91.313,100.219 92.031,100.219 U5.15@92.061,100.249
NetU5_16: U5.16 U6.34 | length 3.4
  Top Layer w0.2: U6.34@89.317,98.102 89.325,98.11 89.77,98.11 91.408,99.749 U5.16@92.061,99.749
NetU5_17: U5.17 U6.33 | length 3.4
  Top Layer w0.2: U6.33@89.317,97.602 89.325,97.61 89.835,97.61 91.469,99.244 U5.17@92.056,99.244
NetU5_18: U5.18 U6.32 | length 3.4
  Top Layer w0.2: U6.32@89.317,97.102 89.325,97.11 89.901,97.11 91.51,98.719 92.031,98.719 U5.18@92.061,98.749
NetU6_18: U6.18 U8.18 | length 8.1
  Top Layer w0.2: U6.18@85.715,93.001 85.723,92.992 85.723,92.35 88.278,89.796 U8.18@92.077,89.796
NetU6_19: U6.19 U8.17 | length 7.3
  Top Layer w0.2: U6.19@86.215,93.001 86.223,92.992 86.223,92.416 88.344,90.296 U8.17@92.077,90.296
NetU6_20: U6.20 U8.16 | length 6.6
  Top Layer w0.2: U6.20@86.715,93.001 86.723,92.992 86.723,92.482 88.409,90.796 U8.16@92.077,90.796
NetU6_21: U6.21 U8.15 | length 5.8
  Top Layer w0.2: U6.21@87.215,93.001 87.223,92.992 87.223,92.547 88.475,91.296 U8.15@92.077,91.296
NetU6_22: U6.22 U8.14 | length 5.1
  Top Layer w0.2: U6.22@87.715,93.001 87.723,92.992 87.723,92.613 88.541,91.796 U8.14@92.077,91.796
NetU6_26: U6.26 U8.13 | length 3.5
  Top Layer w0.2: U6.26@89.317,94.102 89.921,94.102 90.767,93.256 90.767,93.212 91.653,92.326 92.047,92.326 U8.13@92.077,92.296
NetU6_27: U6.27 U8.12 | length 3.5
  Top Layer w0.2: U6.27@89.317,94.602 90.021,94.602 91.797,92.826 91.827,92.796 U8.12@92.077,92.796
NetU6_28: U6.28 U8.11 | length 4.5
  Top Layer w0.2: U6.28@89.317,95.102 90.455,95.102 92.165,93.392 92.932,93.392 92.962,93.362 U8.11@92.962,93.181
OPAMP_OUT: C45.1 R3.2 R25.1 | length 5.1
  Top Layer w0.25: R3.2@61.835,93.304 R25.1@63.994,93.304 64.469,93.779 64.469,94.299 65.07,94.9 65.07,95.1 65.445,95.475 C45.1@65.645,95.475
VIN: C4.1 C12.2 C13.1 C14.1 C15.1 C17.2 C25.2 J4.A4 J4.A9 J4.B4 J4.B9 P5.1 P5.2 U2.1 U2.3 U3.1 U3.3 U10.1 U10.11 U10.13 | length 124.1
  Top Layer w0.25: v2(55.88,65.278) 55.988,65.278 56.242,65.532 U10.13@58.892,65.532 ; v2(55.88,66.802) 55.988,66.802 56.258,66.532 U10.11@58.892,66.532 ; v2(62.865,63.119) 62.865,64.009 62.888,64.032 U10.1@62.992,64.032
  Top Layer w0.4: J4.B9@41.436,68.715 J4.A4@41.436,70.065 41.436,73.44 43.358,75.362 46.105,75.362 45.686,74.943 J4.A9@45.686,70.065 J4.B4@45.686,68.715 ; C4.1@46.355,75.362 C15.1@50.419,75.362 ; C15.1@50.419,75.45 54.48,75.45 58.978,79.948 C17.2@72.898,79.948 ; C17.2@73.025,79.948 74.103,79.948 74.376,79.675 74.376,79.505 74.506,79.375 U2.1@74.676,79.375 75.565,79.375 75.819,79.121 75.819,77.724 75.57,77.475 U2.3@74.676,77.475 74.846,77.475 75.251,77.07 75.251,76.945 75.742,76.454 82.042,76.454 83.947,78.359 83.947,80.645 84.709,81.407 85.66,81.407 C25.2@85.725,81.472 85.794,81.541 87.561,81.541 C13.1@87.63,81.61 89.123,81.61 89.362,81.849 C14.1@89.662,81.849 91.391,81.849 U3.1@91.645,81.595 ; U3.3@91.849,79.695 91.874,79.67 92.542,79.67 92.709,79.503 99.441,72.771 P5.2@99.441,65.151 ; U3.1@91.849,81.595 91.91,81.534 92.583,81.534 92.837,81.28 92.837,80.48 U3.3@92.052,79.695
  Layer 1 w0.25: v2(55.88,65.278) v2(55.88,66.802)
  Layer 2 w0.4: J4.B4@45.686,68.715 45.734,68.667 45.734,68.058 46.356,67.436 46.482,67.31 55.318,67.31 55.826,66.802 v2(55.88,66.802) ; v2(55.88,65.278) 58.293,65.278 60.452,63.119 v2(62.865,63.119)
  Layer 2 w0.6: P5.1@99.441,62.611 P5.2@99.441,65.151
pads on no net: J4.A5 J4.A6 J4.A7 J4.A8 J4.B5 J4.B6 J4.B7 J4.B8 U1.1 U1.2 U1.3 U2.4 U3.4 U4.1 U4.2 U4.3 U4.4 U4.5 U4.6 U4.24 U4.26 U4.27 U4.28 U4.30 U4.31 U4.32 U4.33 U4.34 U4.35 U4.36 U4.37 U4.38 U4.39 U4.40 U4.41 U4.42 U4.43 U4.44 U4.45 U4.46 U4.47 U4.48 U5.21 U6.29 U6.43 U7.7 U8.21 U9.3 U9.5 U10.8 U10.9

## Polygon pours and split planes (outlines as drawn)
ADC_AVDD on Layer 2 "ADC_AVDD_L03_P002" (solid, remove dead copper, pour order 2): 89.027,109.347 76.581,109.347 76.581,79.502 79.248,76.835 87.122,76.835 88.9,78.613
ADC_OVDD on Layer 2 "ADC_OVDD_L03_P001" (solid, remove dead copper, pour order 1): 89.662,106.934 89.662,79.375 93.726,75.311 101.6,75.311 101.6,108.331 101.6,109.474 89.662,109.474 89.662,105.918
GND on Layer 1 "NONET_L-01_P-001" (solid, remove dead copper, pour order 5): 35.28,124.313 35.426,124.46 133.858,124.46 133.858,58.293 133.731,58.166 35.179,58.166
GND on Top Layer "NONET_L-01_P-001" (solid, remove dead copper, pour order 4): 35.28,124.313 35.426,124.46 133.858,124.46 133.858,58.293 133.731,58.166 35.179,58.166
GND on Bottom Layer "NONET_L-01_P-001" (solid, remove dead copper, pour order 6): 35.28,124.313 35.426,124.46 133.858,124.46 133.858,58.293 133.731,58.166 35.179,58.166

## Keep-outs
Keep-Out Layer:
  lines w0.254: 35.179,58.293 133.985,58.293 133.985,124.333 35.179,124.333 35.179,58.293

## Silkscreen, mask and mechanical layers (free items; w line width, h text height)
Top Overlay:
  text "+5" at 58.928,73.93 h1.4
  text "-5" at 68.707,72.533 h1.4
  text "+5" at 93.218,60.214 h1.4
  text "-5" at 95.885,60.214 h1.4
  text "GND" at 81.534,59.706 h1.4

## Text inside footprints (layer, text, board x,y; h text height)
P2: Top Overlay "OVDD" at 88.646,60.198 h1.4; Top Overlay "AVDD" at 85.217,66.802 h1.4